# EAGLE board nixie driver (EAGLE 6.5.0)

Size 100 x 80 mm. Coordinates in mm from the lower left corner, seen from the top.
Outline: 0,0 100,0 100,80 0,80 0,0
Outline: circle at 17.78,39.37 radius 12.51
Copper layers (1*16): Top 0.035mm / dielectric 1.5mm / Bottom 0.035mm
Design rules "default": minimum track width 10mil, minimum drill 24mil, track to track 8mil, track to pad 8mil, pad to pad 8mil, via to via 8mil, smd to smd 8mil, copper to edge 40mil, drill to drill 8mil, minimum pad ring 10mil, minimum via ring 8mil, stop-mask expansion 4mil, vias tented up to drill 0mil, thermal gap 10mil

## Footprints (pad centres in the part's own frame; a part is rotated, then mirrored left to right if it is on the bottom)
SMD1,27-2,54 = smd 1.27 x 2.54: 1 0,0
SOT23-BEC = smd 1 x 1.4: B -0.95,-1.1; C 0,1.1; E 0.95,-1.1

## Placement (x,y rotation side)
PAD1  [SMD1,27-2,54]  -13.97,3.81 0 top  (outside the outline)
PAD2  [SMD1,27-2,54]  -17.78,3.81 0 top  (outside the outline)
PAD3  [SMD1,27-2,54]  -21.59,3.81 0 top  (outside the outline)
PAD4  [SMD1,27-2,54]  -25.4,3.81 0 top  (outside the outline)
PAD5  [SMD1,27-2,54]  -29.21,3.81 0 top  (outside the outline)
PAD6  [SMD1,27-2,54]  -13.97,10.16 0 top  (outside the outline)
PAD7  [SMD1,27-2,54]  -17.78,10.16 0 top  (outside the outline)
PAD8  [SMD1,27-2,54]  -21.59,10.16 0 top  (outside the outline)
PAD9  [SMD1,27-2,54]  -25.4,10.16 0 top  (outside the outline)
T1  [SOT23-BEC]  -30.48,8.89 0 top  (outside the outline)
T2  [SOT23-BEC]  -15.24,15.24 0 top  (outside the outline)
T3  [SOT23-BEC]  -20.32,15.24 0 top  (outside the outline)
T4  [SOT23-BEC]  -25.4,15.24 0 top  (outside the outline)
T5  [SOT23-BEC]  -30.48,15.24 0 top  (outside the outline)
T6  [SOT23-BEC]  -15.24,21.59 0 top  (outside the outline)
T7  [SOT23-BEC]  -20.32,21.59 0 top  (outside the outline)
T8  [SOT23-BEC]  -25.4,21.59 0 top  (outside the outline)
T9  [SOT23-BEC]  -30.48,21.59 0 top  (outside the outline)

## Library data of the parts
PAD1-PAD9 = wirepad
T1-T9 = transistor-neu-to92

## Nets
DGND: T1.E T2.E T3.E T4.E T5.E T6.E T7.E T8.E T9.E
N$1: PAD5.1 T5.B
N$2: PAD4.1 T4.B
N$3: PAD3.1 T3.B
N$4: PAD2.1 T2.B
N$5: PAD1.1 T1.B
N$6: PAD6.1 T6.B
N$7: PAD7.1 T7.B
N$8: PAD8.1 T8.B
N$9: PAD9.1 T9.B

## Tracks (layer width: path | path; a pad name or v marks a point on that pad's centre or on a via)
DGND  (8 unrouted)
N$1  (1 unrouted)
N$2  (1 unrouted)
N$3  (1 unrouted)
N$4  (1 unrouted)
N$5  (1 unrouted)
N$6  (1 unrouted)
N$7  (1 unrouted)
N$8  (1 unrouted)
N$9  (1 unrouted)